# EAGLE board apds9250_v_1_0 (EAGLE 8.4.2)
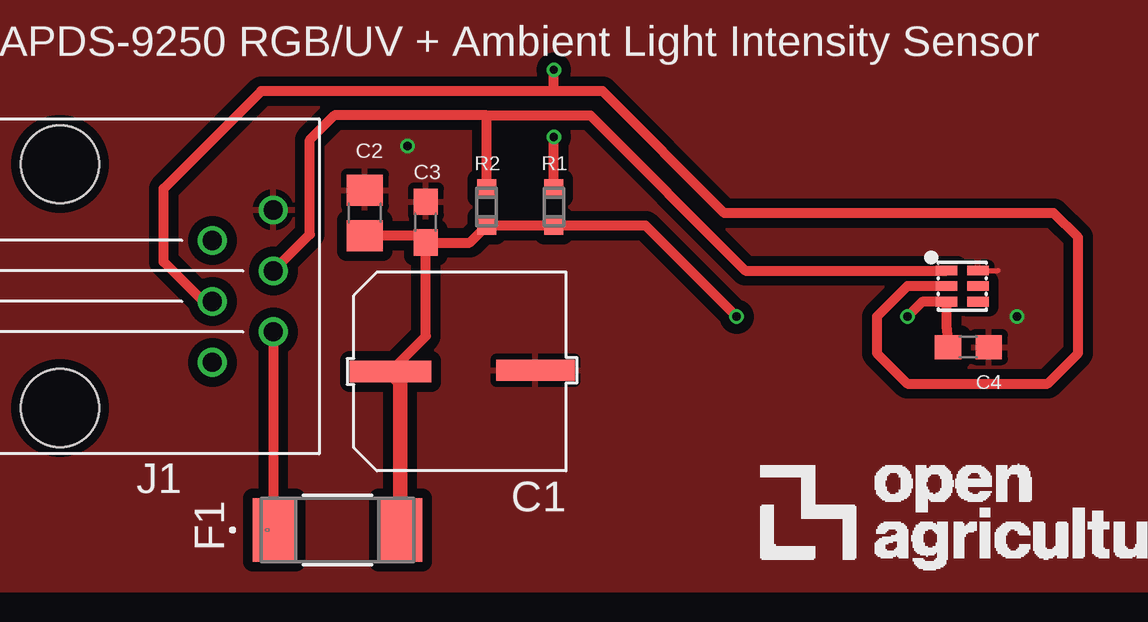
[diagram p0: board, top side]
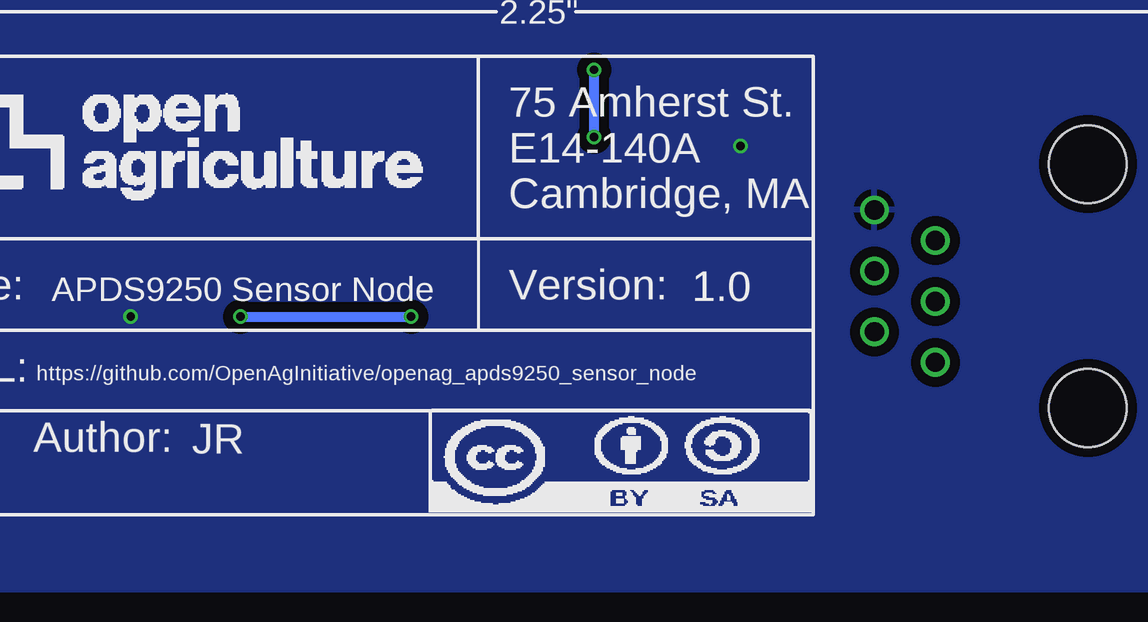
[diagram p1: board, bottom side, seen from below]

No outline drawn. Coordinates in mm, seen from the top.
Copper layers (1*16): Top 0.035559375mm / dielectric 1.6mm / Bottom 0.035559375mm
Design rules "oshpark-2layer": minimum track width 6mil, minimum drill 10mil, track to track 6mil, track to pad 6mil, pad to pad 6mil, via to via 6mil, smd to smd 6mil, copper to edge 15mil, drill to drill 6mil, minimum pad ring 5mil, minimum via ring 5mil, stop-mask expansion 2.5mil, vias tented up to drill 0mil, thermal gap 10mil
Holes 0 mm at 3.17,3.17 3.17,22.23 60.33,22.23 60.33,3.17
tRestrict: area 1.5,20.6 to 4.8,23.9; area 1.5,1.5 to 4.8,4.8; area 58.7,20.6 to 62,23.9; area 58.7,1.5 to 62,4.8
bRestrict: area 1.5,20.6 to 4.8,23.9; area 1.5,1.5 to 4.8,4.8; area 58.7,20.6 to 62,23.9; area 58.7,1.5 to 62,4.8

## Footprints (pad centres in the part's own frame; a part is rotated, then mirrored left to right if it is on the bottom)
EEE-1HA101UP = smd 0.889 x 3.404: + 0,-3.251 | smd 0.889 x 3.251: - -0.051,2.794
C0805 = smd 1.3 x 1.5: 1 -0.95,0; 2 0.95,0
C0603 = smd 1.1 x 1: 1 -0.85,0; 2 0.85,0
SS = smd 1.803 x 2.642: 1 -2.629,0; 2 2.629,0
RJ12 = drill 0.8: 1 -8.89,-3.175; 2 -6.35,-1.905; 3 -8.89,-0.635; 4 -6.35,0.635; 5 -8.89,1.905; 6 -6.35,3.175 | hole 3.25: 0,-5.08; 0,5.08
RC0603N = smd 0.756 x 0.8: 1 -0.778,0; 2 0.778,0
APDS-9250 = smd 0.4 x 0.9: 1 -0.65,-0.65; 2 0,-0.65; 3 0.65,-0.65; 4 0.65,0.65; 5 0,0.65; 6 -0.65,0.65

## Placement (x,y rotation side)
C1  100uF  [EEE-1HA101UP]  25.91,9.14 270 top
C2  4.7uF  [C0805]  21.59,15.75 90 top
C3  0.1uF  [C0603]  24.13,15.37 90 top
C4  0.1uF  [C0603]  46.74,10.16 0 top
F1  SST 7  [SS]  20.45,2.54 0 top
FRAME1  [DOCFIELD]  58.42,3.17 0 bottom
J1  RJ12  [RJ12]  8.89,12.7 180 top
R1  1K  [RC0603N]  29.46,16 270 top
R2  1K  [RC0603N]  26.67,16 270 top
U1  APDS-9250  [APDS-9250]  46.48,12.7 270 top
U$2  [OPENAG-LOGO-750-MIL]  38.1,1.27 0 top

## Library data of the parts
C1-C4 = openag-capacitors; POPULATE: YES; VERIFIED: NO
F1 = openag-fuses; POPULATE: YES; VERIFIED: NO
FRAME1 = openag-frames; AUTHOR: JR; DESCRIPTION: APDS-9250 RGB/UV + Ambient Light Intensity Sensor Node; TITLE: APDS9250 Sensor Node; URL: https://github.com/OpenAgInitiative/openag_apds9250_sensor_node; VER: 1.0
J1 = openag-connectors; POPULATE: YES; VERIFIED: NO
R1 R2 = openag-resistors; POPULATE: YES; VERIFIED: NO
U1 = openag-sensors; POPULATE: YES; VERIFIED: NO
U$2 = openag-frames

## Nets
3V3_IN: F1.1 J1.5
5V_IN: J1.6
+3V3: C1.+ C2.1 C3.1 C4.1 F1.2 R1.2 R2.2 U1.3
GND: C1.- C2.2 C3.2 C4.2 J1.1 U1.6
IO: J1.2
SCL: J1.3 R2.1 U1.1
SDA: J1.4 R1.1 U1.2

## Tracks (layer width: path | path; a pad name or v marks a point on that pad's centre or on a via)
3V3_IN
  Top 0.406: J1.5 17.78,2.58 F1.1
+3V3  (via drill 0.35)
  Top 0.152: C3.1 24.19,14.58
  Top 0.406: C1.+ 24.13,10.62 C3.1 | C3.1 23.85,14.8 C2.1 | C3.1 25.96,14.52 R2.2 R1.2 33.29,15.22 v37.08,11.43 | C4.1 45.83,10.98 U1.3 44.82,12.05 v44.2,11.43
  Top 0.61: F1.2 23.08,8.72 C1.+
  Bottom 0.406: v44.2,11.43 v37.08,11.43
GND  (via drill 0.35)
  Top 0.203: U1.6 47.97,13.35 47.98,13.36
  other vias: 23.37,18.54 48.77,11.43
  pour Top (isolate 0.406): 0,25.4 63.5,25.4 63.5,0 0,0
  pour Bottom (isolate 0.406): 63.5,25.4 63.5,0 0,0 0,25.4
SCL
  Top 0.406: J1.3 19.3,14.86 19.3,18.8 20.32,19.81 26.67,19.81 | 26.67,19.81 30.99,19.81 37.45,13.35 U1.1 | R2.1 26.67,19.81
SDA  (via drill 0.35)
  Top 0.406: J1.4 14.86,12.06 13.21,13.72 13.21,16.76 17.27,20.83 29.46,20.83 | 29.46,20.83 31.5,20.83 36.58,15.75 50.29,15.75 51.31,14.73 51.31,9.91 50.04,8.64 44.2,8.64 42.93,9.91 42.93,11.43 44.2,12.7 U1.2 | R1.1 v29.46,18.92 | 29.46,20.83 v29.46,21.72
  Bottom 0.406: v29.46,18.92 29.46,20.57 | 29.46,20.57 29.46,20.83 | 29.46,20.57 v29.46,21.72

## Text on the board
tPlace: APDS-9250 RGB/UV + Ambient Light Intensity Sensor | I2C Addr: 0x52
bPlace: 2.25" | 0.125" | d=0.15" | 0.75" | 0.125"